# Altium PCB newwind.PcbDoc
Units mil, origin at the board's own origin, x right, y up, seen from the top; angles counter-clockwise.
Board outline 4000 x 6500 mil, 2 copper layers (Top Layer, Bottom Layer); 121 components, 104 nets, 466 pads, 76 vias.
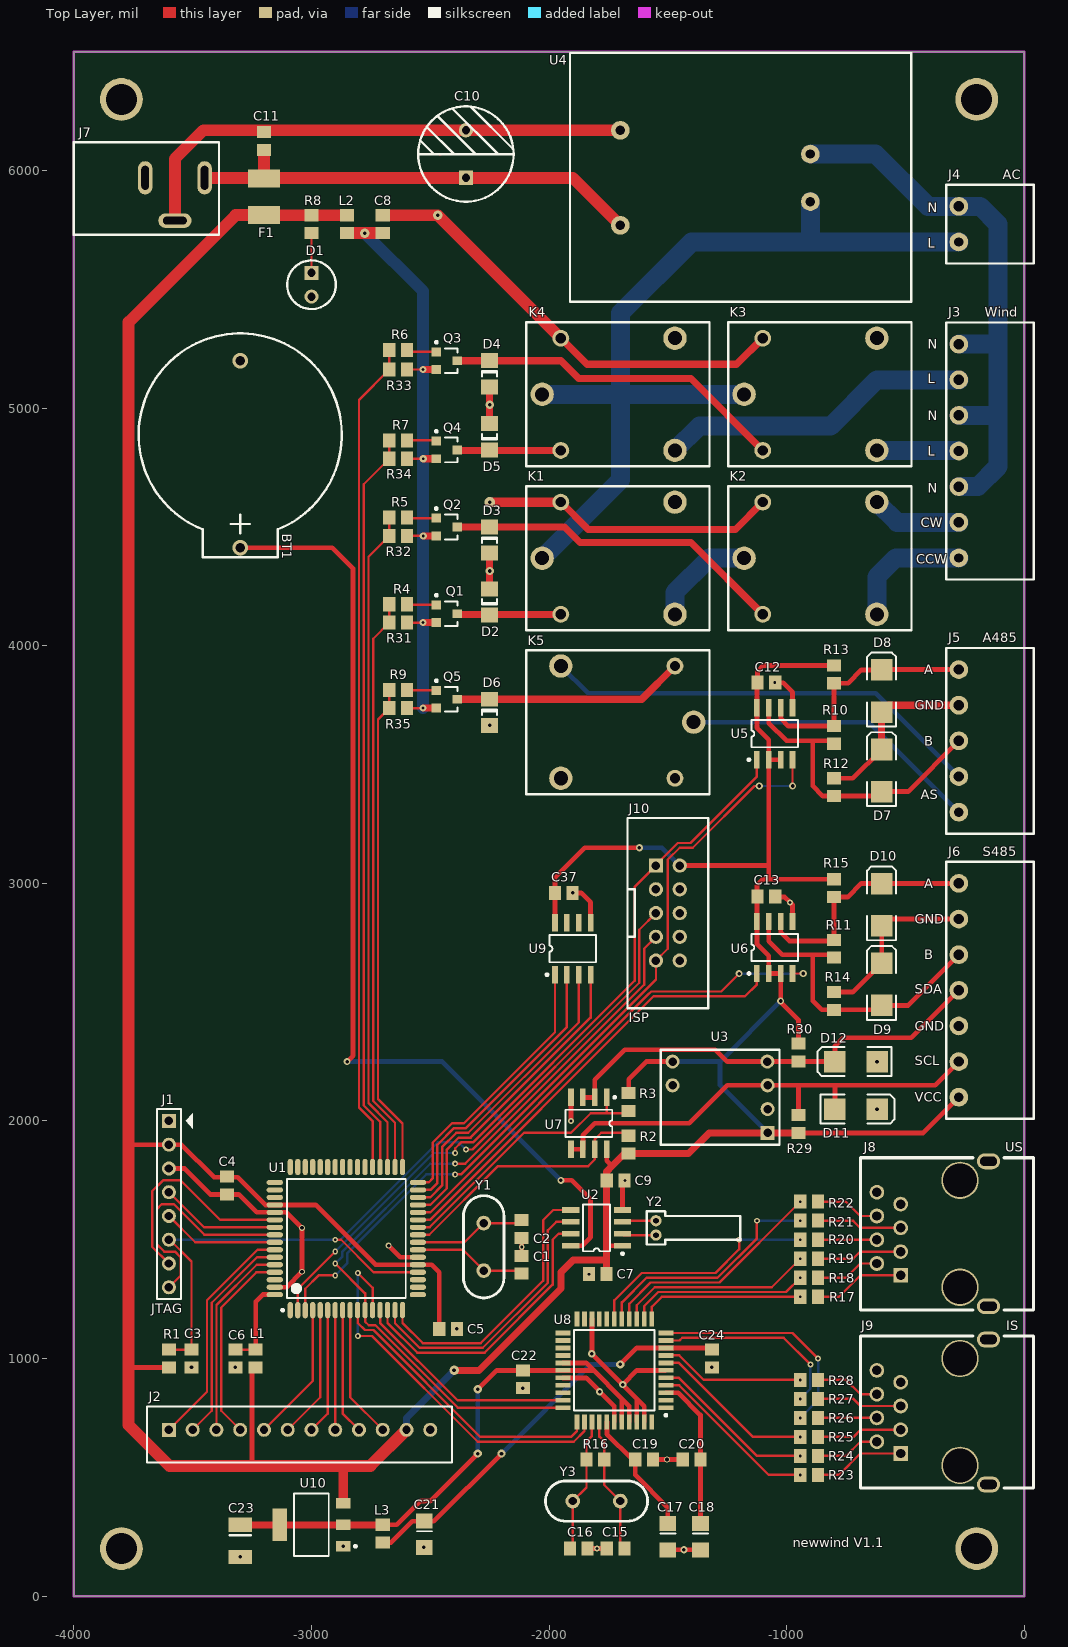
[diagram p0: Top Layer view]
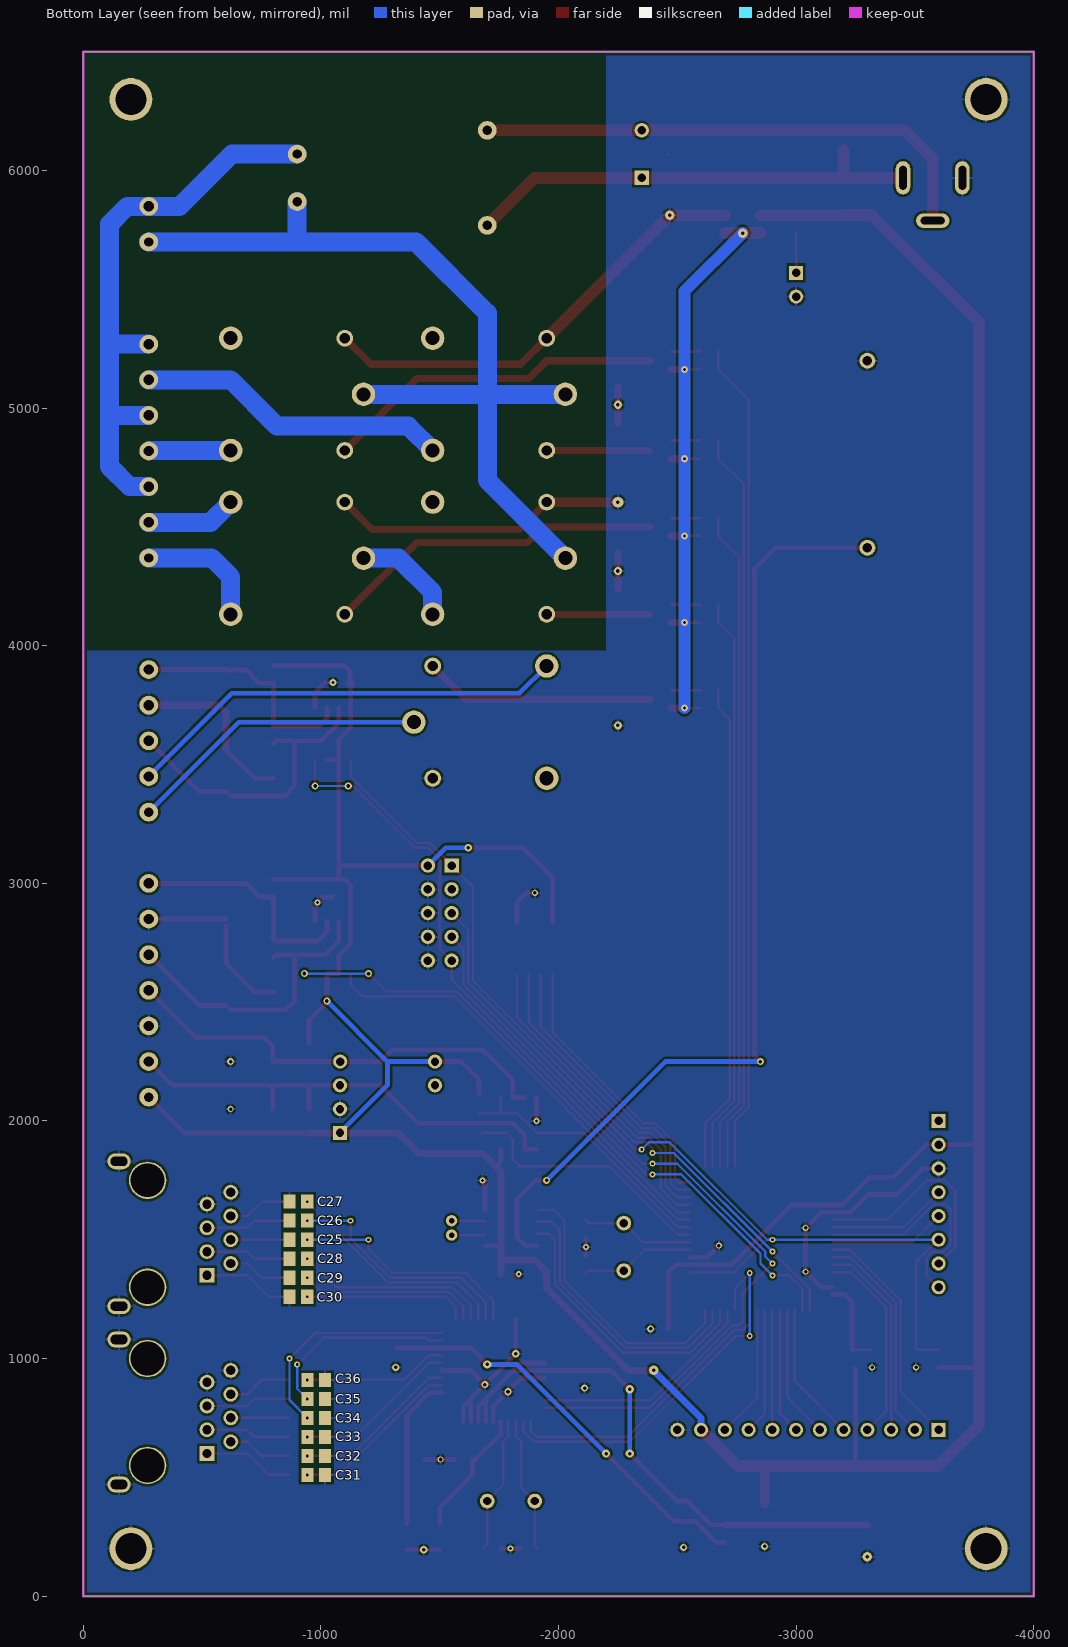
[diagram p1: Bottom Layer view, seen from below]

## Layer stack, top to bottom
Top Solder: solder mask 0.4, Solder Resist, Dk 3.5
Top Layer: signal copper 1.4
Dielectric 1: dielectric 12.6, FR-4, Dk 4.8
Bottom Layer: signal copper 1.4
Bottom Solder: solder mask 0.4, Solder Resist, Dk 3.5

## Board outline
-4000,0 0,0 0,6500 -4000,6500

## Design rules (kind name [scope] priority, off if disabled: settings)
Clearance [All] p1: gap=10 ignorepadtopadclearanceinfootprint=FALSE except(0: Arc-Hole Track-Hole SMDPad-Hole THPad-Hole Via-Hole Fill-Hole Poly-Hole Region-Hole Text-Hole; 8: SMDPad-SMDPad)
HoleSize [All] p1: absolutevalues=TRUE maxlimit=150 minlimit=1 maxpercent=80.000 minpercent=20.000
MinimumSolderMaskSliver [All] p1: minsoldermaskwidth=1
PolygonConnect [All] p1: connectstyle=Relief reliefconductorwidth=10 reliefentries=4 polygonreliefangle="90 Angle" airgapwidth=10
RoutingVias [All] p1: holewidth=12 width=25 viastyle="Through Hole" minholewidth=12 minwidth=25 maxholewidth=15 maxwidth=50
SilkToSilkClearance [All] p1: silktosilkclearance=8
SilkToSolderMaskClearance [IsPad] p1: minsilkscreentomaskgap=6 clearancetoexposedcopper=TRUE
SolderMaskExpansion [All] p1: expansion=4
Width GND [InNet('GND')] p1: maxlimit=50 minlimit=10 preferedwidth=40 toplayer_prefwidth=20 bottomlayer_minwidth=20 minimp=50.000000 maximp=50.000000 favimp=50.000000
Width VCC [InNet('VCC')] p2: maxlimit=50 minlimit=20 preferedwidth=20 minimp=50.000000 maximp=50.000000 favimp=50.000000
Width L [InNet('NetJ4_1')] p3: maxlimit=80 minlimit=40 preferedwidth=80 minimp=50.000000 maximp=50.000000 favimp=50.000000
Width N [InNet('NetJ3_3')] p4: maxlimit=80 minlimit=40 preferedwidth=80 minimp=50.000000 maximp=50.000000 favimp=50.000000
Width [All] p5: maxlimit=80 minlimit=10 preferedwidth=10 minimp=50.000000 maximp=50.000000 favimp=50.000000
26 further rules are at their usual default settings.

## Components (designator, comment, footprint, x,y, rotation, side; value= is the part's Value field where it differs from the comment)
BT1 "3V" CR2032 -3300,4412.6 r180 top
C1 "22pF" 0805 -2115,1394.76 r270 top
C2 "22pF" 0805 -2115,1545 r90 top
C3 "104" 0805 -3505,1000 r90 top
C4 "104" 0805 -3355,1728.23 r270 top
C5 "104" 0805 -2425,1125 r0 top
C6 "104" 0805 -3320,1000 r90 top
C7 "104" 0805 -1795,1355 r0 top
C8 "104" 0805 -2700,5775 r90 top
C9 "104" 0805 -1720,1750 r0 top
C10 "1000uF" C10 -2350,5970 r90 top
C11 "104" 0805 -3200,6125 r90 top
C12 "104" 0805 -1085,3845 r0 top
C13 "104" 0805 -1085,2945 r180 top
C15 "15pF" 0805 -1720,200 r0 top
C16 "15pF" 0805 -1875,200 r0 top
C17 "10uF" C1206 -1500,250 r90 top
C18 "10uF" C1206 -1362.6,250 r90 top
C19 "104" 0805 -1600,575 r0 top
C20 "104" 0805 -1400,575 r0 top
C21 "10uF" C1206 -2525,260 r90 top
C22 "104" 0805 -2110,912.6 r90 top
C23 "100uF" C1210 -3300,165 r90 top
C24 "104" 0805 -1315,1000 r90 top
C25 "333" 0805 -905,1500 r0 bottom
C26 "333" 0805 -905,1580 r0 bottom
C27 "333" 0805 -905,1660 r0 bottom
C28 "333" 0805 -905,1420 r0 bottom
C29 "333" 0805 -905,1340 r0 bottom
C30 "333" 0805 -905,1260 r0 bottom
C31 "333" 0805 -980,510 r180 bottom
C32 "333" 0805 -980,590 r180 bottom
C33 "333" 0805 -980,670 r180 bottom
C34 "333" 0805 -980,750 r180 bottom
C35 "333" 0805 -980,830 r180 bottom
C36 "333" 0805 -980,910 r180 bottom
C37 "104" 0805 -1938,2960 r0 top
D1 "Power" LED-2P -3000,5570 r270 top
D2 "1N4148" 1206 -2250,4185 r270 top
D3 "1N4148" 1206 -2250,4445 r90 top
D4 "1N4148" 1206 -2250,5145 r90 top
D5 "1N4148" 1206 -2250,4880 r270 top
D6 "1N4148" 1206 -2250,3720 r90 top
D7 "SMBJ6.8CA" SMB -600,3475 r90 top
D8 "SMBJ6.8CA" SMB -600,3810 r90 top
D9 "SMBJ6.8CA" SMB -600,2575 r90 top
D10 "SMBJ6.8CA" SMB -600,2910 r90 top
D11 "SMBJ6.8CA" SMB -708,2050 r0 top
D12 "SMBJ6.8CA" SMB -708,2250 r180 top
F1 "2A" 1812 -3200,5890 r270 top
J1 "JTAG" CON8 -3600,2000 r270 top
J2 "Panel" XH2.54-12P -3600,700 r0 top
J3 "Wind" 2EDG-3.81-7P -275,4370 r90 top
J4 "AC" 2EDG-3.81-2P -275,5700 r90 top
J5 "A485" 2EDG-3.81-5P -275,3300 r90 top
J6 "S485" 2EDG-3.81-7P -275,2100 r90 top
J7 "DC" PWR2.5 -3950,5910 r0 top
J8 "US" RJ-45 -385,1525 r0 top
J9 "IS" RJ-45 -385,775 r0 top
J10 "ISP" DC3-10 -1550,3075 r0 top
K1 "" T73 -1470,4605 r0 top
K2 "" T73 -620.04,4605 r0 top
K3 "" T73 -620.04,5295 r0 top
K4 "" T73 -1470,5295 r0 top
K5 "" T73 -1950.31,3442.56 r180 top
L1 "10uH" 0805 -3235,1000 r90 top
L2 "10uH" 0805 -2850,5775 r90 top
L3 "10uH" 0805 -2700,263 r90 top
Q1 "8550" SOT-23-3 -2430,4135 r270 top
Q2 "8550" SOT-23-3 -2430,4500 r270 top
Q3 "8550" SOT-23-3 -2430,5200 r270 top
Q4 "8550" SOT-23-3 -2430,4824.88 r270 top
Q5 "8550" SOT-23-3 -2430,3775.12 r270 top
R1 "104" 0805 -3600,1000 r90 top
R2 "103" 0805 -1665,1900 r90 top
R3 "103" 0805 -1665,2080 r270 top
R4 "102" 0805 -2635,4175 r0 top
R5 "102" 0805 -2635,4540 r0 top
R6 "102" 0805 -2635,5245 r0 top
R7 "102" 0805 -2635,4865 r0 top
R8 "102" 0805 -3000,5775 r90 top
R9 "102" 0805 -2635,3815 r180 top
R10 "121" 0805 -800,3625 r270 top
R11 "121" 0805 -800,2725 r270 top
R12 "102" 0805 -800,3405 r90 top
R13 "102" 0805 -800,3880 r270 top
R14 "102" 0805 -800,2505 r90 top
R15 "102" 0805 -800,2980 r270 top
R16 "106" 0805 -1805,575 r180 top
R17 "102" 0805 -905,1260 r0 top
R18 "102" 0805 -905,1340 r0 top
R19 "102" 0805 -905,1420 r0 top
R20 "102" 0805 -905,1500 r0 top
R21 "102" 0805 -905,1580 r0 top
R22 "102" 0805 -905,1660 r0 top
R23 "102" 0805 -905,510 r0 top
R24 "102" 0805 -905,590 r0 top
R25 "102" 0805 -905,670 r0 top
R26 "102" 0805 -905,750 r0 top
R27 "102" 0805 -905,830 r0 top
R28 "102" 0805 -905,910 r0 top
R29 "102" 0805 -949.6,1987 r90 top
R30 "102" 0805 -950,2288 r90 top
R31 "103" 0805 -2635,4097.6 r180 top
R32 "103" 0805 -2635,4462.72 r180 top
R33 "103" 0805 -2635,5163 r180 top
R34 "103" 0805 -2635,4787.48 r180 top
R35 "103" 0805 -2635,3737.72 r0 top
U1 "ATmega128A-8AU" ATMega128 -2853,1505 r90 top
U2 "DS1302Z" SOP-8P-3.9 -1800,1550 r90 top
U3 "SHT3X" SHT3X -1080,1950 r180 top
U4 "5V/1A" HIECUBE12W -900,6070 r180 top
U5 "MAX13487E" SOP-8P-3.9 -1050,3630 r0 top
U6 "MAX13487E" SOP-8P-3.9 -1050,2730 r0 top
U7 "P82B96TD" SOP-8P-3.9 -1832.4,1990 r180 top
U8 "RN8302B" QFP-44P-0.8 -1725,950 r180 top
U9 "93C46" SOP-8P-3.9 -1900,2725 r0 top
U10 "1117-3.3" SOT-223 -3000,300 r90 top
Y1 "14.7456M" CRYSTAL-2P -2275,1570 r90 top
Y2 "32.768K" 32.768K -1550,1499.68 r180 top
Y3 "8.192M" CRYSTAL-2P -1700,400 r0 top

## Footprints (in the part's own frame and the unit in brackets; to place one, negate y for a bottom-side part, rotate by r counter-clockwise, add the part's x,y. Pads: shape width x height; smd on the part's side, far side on the other; paste and mask are expansions set on the pad)
2EDG-3.81-2P [mm]
  round 2 hole 1: 1(0,0)
  round 2 hole 1.1: 2(3.81,0)
  silkscreen extent -2.3,-8 6.11,1.35
2EDG-3.81-5P [mm]
  round 2 hole 1: 1(0,0)
  round 2 hole 1.1: 2(3.81,0) 3(7.62,0) 4(11.43,0) 5(15.24,0)
  silkscreen extent -2.3,-8 17.54,1.35
2EDG-3.81-7P [mm]
  round 2 hole 1: 1(0,0)
  round 2 hole 1.1: 2(3.81,0) 3(7.62,0) 4(11.43,0) 5(15.24,0) 6(19.05,0) 7(22.86,0)
  silkscreen extent -2.3,-8 25.16,1.35
32.768K [mm]
  round 1.2 hole 0.6: 1(0,-0.5) 2(0,-2.04)
  silkscreen extent -9,-3.04 1,0.5
0805 [mm]
  rect 1.3x1.5 smd: 1(-0.95,0) 2(0.95,0)
1206 [mm]
  rect 1.6x1.8 smd: 1(-1.4,0) 2(1.4,0)
  silkscreen extent -0.3,-0.8 0.3,0.8
1812 [mm]
  rect 1.9x3.4 smd: 1(-1.95,0) 2(1.95,0)
ATMega128 [mm]
  oval 1.75x0.55 smd: 1(-7.65,6) 2(-7.65,5.2) 3(-7.65,4.4) 4(-7.65,3.6) 5(-7.65,2.8) 6(-7.65,2) 7(-7.65,1.2) 8(-7.65,0.4) 9(-7.65,-0.4) 10(-7.65,-1.2) 11(-7.65,-2) 12(-7.65,-2.8) 13(-7.65,-3.6) 14(-7.65,-4.4) 15(-7.65,-5.2) 16(-7.65,-6) 33(7.65,-6) 34(7.65,-5.2) 35(7.65,-4.4) 36(7.65,-3.6) 37(7.65,-2.8) 38(7.65,-2) 39(7.65,-1.2) 40(7.65,-0.4) 41(7.65,0.4) 42(7.65,1.2) 43(7.65,2) 44(7.65,2.8) 45(7.65,3.6) 46(7.65,4.4) 47(7.65,5.2) 48(7.65,6)
  oval 0.55x1.75 smd: 17(-6,-7.65) 18(-5.2,-7.65) 19(-4.4,-7.65) 20(-3.6,-7.65) 21(-2.8,-7.65) 22(-2,-7.65) 23(-1.2,-7.65) 24(-0.4,-7.65) 25(0.4,-7.65) 26(1.2,-7.65) 27(2,-7.65) 28(2.8,-7.65) 29(3.6,-7.65) 30(4.4,-7.65) 31(5.2,-7.65) 32(6,-7.65) 49(6,7.65) 50(5.2,7.65) 51(4.4,7.65) 52(3.6,7.65) 53(2.8,7.65) 54(2,7.65) 55(1.2,7.65) 56(0.4,7.65) 57(-0.4,7.65) 58(-1.2,7.65) 59(-2,7.65) 60(-2.8,7.65) 61(-3.6,7.65) 62(-4.4,7.65) 63(-5.2,7.65) 64(-6,7.65)
  silkscreen extent -7.77,-6.35 6.35,6.95
C10 [mil]
  rect 60x60 hole 34.65: 1(0,0)
  round 60 hole 34.65: 2(200,0)
  Top Layer lines w10: 100,110 100,105
  silkscreen extent -101,-201 301,201
C1206 [mm]
  rect 1.6x1.8 smd: 1(1.4,0) 2(-1.4,0)
  silkscreen extent 0.33,-0.81 0.33,0.79
C1210 [mil]
  rect 60x100 smd: 1(135,0) 2(0,0)
  silkscreen extent 91,-44 91,44
CON8 [mm]
  rect 1.5x1.5 hole 0.9: 1(0,0)
  round 1.5 hole 0.9: 2(2.54,0) 3(5.08,0) 4(7.62,0) 5(10.16,0) 6(12.7,0) 7(15.24,0) 8(17.78,0)
  silkscreen extent -1.27,-1.27 19.05,1.27
CR2032 [mm]
  round 1.7 hole 1: 1(0,0) 2(0,-20)
  silkscreen extent -10.86,-22.92 10.86,1
CRYSTAL-2P [mil]
  round 62 hole 35: 1(0,0) 2(-200,0)
  silkscreen extent -315,-85 115,85
DC3-10 [mil]
  rect 60x60 hole 35.43: 1(0,0)
  round 60 hole 35.43: 2(100,0) 3(0,-100) 4(100,-100) 5(0,-200) 6(100,-200) 7(0,-300) 8(100,-300) 9(0,-400) 10(100,-400)
  silkscreen extent -120,-600 220,200
HIECUBE12W [mm]
  round 2 hole 1: 1(0,5.08) 2(0,0) 3(20.32,7.62) 4(20.32,-2.54)
  silkscreen extent -10.8,-10.8 25.7,15.79
LED-2P [mm]
  rect 1.5x1.5 hole 0.9: 1(0,0)
  round 1.5 hole 0.9: 2(2.54,0)
  silkscreen extent -1.33,-2.6 3.87,2.6
PWR2.5 [mil]
  oval 61.26x140 hole 31.5 slot 100 at 90 deg: 1(500,60) 2(250,60)
  oval 140x61.26 hole 31.5 slot 100 at 0 deg: 3(375,-120)
  silkscreen extent -50,-180 561,210
QFP-44P-0.8 [mm]
  rect 1.6x0.5 smd: 1(-5.5,4) 2(-5.5,3.2) 3(-5.5,2.4) 4(-5.5,1.6) 5(-5.5,0.8) 6(-5.5,0) 7(-5.5,-0.8) 8(-5.5,-1.6) 9(-5.5,-2.4) 10(-5.5,-3.2) 11(-5.5,-4) 23(5.5,-4) 24(5.5,-3.2) 25(5.5,-2.4) 26(5.5,-1.6) 27(5.5,-0.8) 28(5.5,0) 29(5.5,0.8) 30(5.5,1.6) 31(5.5,2.4) 32(5.5,3.2) 33(5.5,4)
  rect 0.5x1.6 smd: 12(-4,-5.5) 13(-3.2,-5.5) 14(-2.4,-5.5) 15(-1.6,-5.5) 16(-0.8,-5.5) 17(0,-5.5) 18(0.8,-5.5) 19(1.6,-5.5) 20(2.4,-5.5) 21(3.2,-5.5) 22(4,-5.5) 34(4,5.5) 35(3.2,5.5) 36(2.4,5.5) 37(1.6,5.5) 38(0.8,5.5) 39(0,5.5) 40(-0.8,5.5) 41(-1.6,5.5) 42(-2.4,5.5) 43(-3.2,5.5) 44(-4,5.5)
  silkscreen extent -5.63,-4.3 4.3,4.92
RJ-45 [mm]
  rect 1.575x1.575 hole 1: 1(-3.43,-4.445)
  round 1.575 hole 1: 2(-5.97,-3.175) 3(-3.43,-1.905) 4(-5.97,-0.635) 5(-3.43,0.635) 6(-5.97,1.905) 7(-3.43,3.175) 8(-5.97,4.445)
  oval 2.5x1.7 hole 1 slot 1.8 at 0 deg: 9(5.97,-7.75) 10(5.97,7.75)
  round 4 hole 3.6: ""(2.92,-5.715) ""(2.92,5.715)
  silkscreen extent -7.71,-8.13 10.79,8.13
SHT3X [mm]
  rect 1.5x1.5 hole 0.9: 1(0,0)
  round 1.5 hole 0.9: 2(0,-2.54) 3(0,-5.08) 4(0.025,-7.62) 5(10.16,-7.62) 6(10.16,-5.08)
  silkscreen extent -1.27,-8.89 11.43,1.27
SMB [mm] "DO-214-AA/SMB; 2 C-Bend Leads; Body 5.3 x 3.6 mm, inc. leads (LxW)"
  rect 2.3x2.3 smd: 1(-2.25,0) 2(2.25,0)
  silkscreen extent -3.8,-1.55 4.1,1.55
SOP-8P-3.9 [mm]
  rect 0.6x1.85 smd: 1(-1.905,-2.775) 2(-0.635,-2.775) 3(0.635,-2.775) 4(1.905,-2.775) 5(1.905,2.775) 6(0.635,2.775) 7(-0.635,2.775) 8(-1.905,2.775)
  silkscreen extent -2.88,-2.9 2.5,1.45
SOT-23-3 [mm]
  rect 0.95x1 smd: 1(-0.95,-1.125) 2(0.95,-1.125) 3(0,1.125)
  silkscreen extent -2.1,-1.25 1.32,1.13
SOT-223 [mm]
  rect 1.1x1.55 smd: 1(-2.3,-3.375) 2(0,-3.375) 3(2.3,-3.375)
  rect 3.45x1.55 smd: 4(0,3.375)
  silkscreen extent -3.35,-4.83 3.35,1.85
T73 [mm]
  round 2.5 hole 1.5: 1(0,0) 3(-14.2,-6) 5(0,-12)
  round 1.8 hole 1.1: 2(-12.2,0) 4(-12.2,-12)
  silkscreen extent -15.9,-13.7 3.7,1.7
XH2.54-12P [mm]
  rect 1.5x1.5 hole 0.9: 1(0,0)
  round 1.5 hole 0.9: 2(2.54,0) 3(5.08,0) 4(7.62,0) 5(10.16,0) 6(12.7,0) 7(15.24,0) 8(17.78,0) 9(20.32,0) 10(22.86,0) 11(25.4,0) 12(27.94,0)
  silkscreen extent -2.34,-3.5 30.28,2.5

## Part data
BT1: library part Battery, "Multicell Battery"
C1 C2 C3 C4 C5 C6 C7 C8 C9 C11 C12 C13 C15 C16 C19 C20 C22 C24 C25 C26 C27 C28 C29 C30 C31 C32 C33 C34 C35 C36 C37: library part Cap1, "Capacitor"
C10 C17 C18 C21 C23: library part Cap2, "电解电容", LatestRevisionDate=17-Jul-2002, LatestRevisionNote="Re-released for DXP Platform.", PackageReference=C0805, Published=8-Jun-2000, Publisher="Altium Limited"
D1: library part LED, "Typical INFRARED GaAs LED"
D2 D3 D4 D5 D6: library part Diode, "Default Diode", PackageDocument=Sep-1996, Code_JEDEC=DO-214-AB, LatestRevisionDate=17-Jul-2002, LatestRevisionNote="Re-released for DXP Platform.", PackageReference=SMC, Published=8-Jun-2000, Publisher="Altium Limited"
D7 D8 D9 D10 D11 D12: library part TVS, LatestRevisionDate=17-Jul-2002, LatestRevisionNote="Re-released for DXP Platform.", Published=8-Jun-2000, Publisher="Altium Limited"
F1: library part "Fuse 1", "Fuse", LatestRevisionDate=17-Jul-2002, LatestRevisionNote="Re-released for DXP Platform.", PackageReference=PIN-W2/E2.8, Published=8-Jun-2000, Publisher="Altium Limited"
J1: library part MHDR1X8, "Header, 8-Pin", LatestRevisionDate=17-Jul-2002, LatestRevisionNote="Re-released for DXP Platform.", Publisher="Altium Limited"
J2: library part "Header 12", "Header, 12-Pin", LatestRevisionDate=17-Jul-2002, LatestRevisionNote="Re-released for DXP Platform.", Publisher="Altium Limited"
J3 J6: library part MHDR1X7, "Header, 7-Pin", LatestRevisionDate=17-Jul-2002, LatestRevisionNote="Re-released for DXP Platform.", Publisher="Altium Limited"
J4: library part MHDR1X2, "Header, 2-Pin", LatestRevisionDate=17-Jul-2002, LatestRevisionNote="Re-released for DXP Platform.", Publisher="Altium Limited"
J5: library part MHDR1X5, "Header, 5-Pin", LatestRevisionDate=17-Jul-2002, LatestRevisionNote="Re-released for DXP Platform.", Publisher="Altium Limited"
J7: library part PWR2.5, "2.5电源插座", DatasheetDocument=09-May-2002, Published=17-Dec-2003, Publisher="Altium Limited"
J8 J9: library part RJ45, "RJ45水晶座"
J10: library part "Header 5X2", "Header, 5-Pin, Dual row"
K1 K2 K3 K4 K5: library part Relay-6P, "6脚继电器"
L1 L2 L3: library part Inductor, "Inductor"
  L2 L3: Code_IEC=1005, Code_JEITA=0402, LatestRevisionDate=17-Jul-2002, LatestRevisionNote="Re-released for DXP Platform.", PackageReference=0402-A, Published=8-Jun-2000, Publisher="Altium Limited"
Q1 Q2 Q3 Q4 Q5: "PNP三极管"
R1 R2 R3 R4 R5 R6 R7 R8 R9 R10 R11 R12 R13 R14 R15 R16 R17 R18 R19 R20 R21 R22 R23 R24 R25 R26 R27 R28 R29 R30 R31 R32 R33 R34 R35: library part Res, "Resistor"
  R4 R5 R6 R7 R8 R9 R10 R11 R12 R13 R14 R15 R16 R17 R18 R19 R20 R21 R22 R23 R24 R25 R26 R27 R28 R29 R30: LatestRevisionDate=17-Jul-2002, LatestRevisionNote="Re-released for DXP Platform.", Published=8-Jun-2000, Publisher="Altium Limited"
U1: library part ATmega128L-8AC, "8-Bit AVR Microcontroller with 128K Bytes of In-System Programmable Flash Memory"
U2: "Trickle Charge Timekeeping Chip", Code_IPC=SOIC127P600-8, ComponentLink1Description="Manufacturer Link", ComponentLink1URL=http://www.maxim-ic.com/, ComponentLink2Description=Datasheet, ComponentLink2URL=http://pdfserv.maxim-ic.com/en/ds/DS1302.pdf, ComponentLink3Description="Discontinuation Notice", ComponentLink3URL=http://www.maxim-ic.com/qa/pdfs/non-obsolescence-letter.pdf, DatasheetVersion=2-Jul-1999, LatestRevisionDate=13-Apr-2006, LatestRevisionNote="IPC-7351 Footprint Added.", PackageDescription="8-Pin Small Outline Integrated Circuit 1.27 mm Pitch", PackageReference=SOIC8N, PackageVersion=1999, Published=13-Oct-2000, Publisher="Altium Limited"
U4: library part HIECUBE12W, "12W单输出模块"
U9: "SPI EEPROM", PackageDocument=Jul-1999, ComponentLink1Description="Manufacturer Link", ComponentLink1URL=http://www.st.com/, DatasheetDocument=Jun-1997, LatestRevisionDate=6-Jun-2005, LatestRevisionNote="Stylized 3D Model Added.", Note="Do Not Use pin number 7 (DU).", PackageReference=SOP8, Published=24-Aug-2001, Publisher="Altium Limited"
U10: library part 1117, "800mA 稳压", PackageDocument=revC, ComponentLink1Description="Manufacturer Link", ComponentLink1URL=http://www.ti.com/, DatasheetDocument=Sep-1997, LatestRevisionDate=17-Jul-2002, LatestRevisionNote="Re-released for DXP Platform.", PackageReference=ZZ311, Published=8-Jun-2000, Publisher="Altium Limited"
Y1 Y2 Y3: library part CRYSTAL-2, "Crystal Oscillator"

## Free pads (board coordinates)
  round 180 hole 130: ""(-3800,200) ""(-3800,6300) ""(-200,200) ""(-200,6300)

## Via types
v1: diameter 25, hole 12, Top Layer to Bottom Layer, 32 vias
v2: diameter 30, hole 15, Top Layer to Bottom Layer, 18 vias
v3: diameter 25, hole 15, Top Layer to Bottom Layer, 8 vias
v4: diameter 35, hole 15, Top Layer to Bottom Layer, 7 vias
v5: diameter 30, hole 12, Top Layer to Bottom Layer, 6 vias
v6: diameter 40, hole 15, Top Layer to Bottom Layer, 4 vias
v7: diameter 45, hole 15, Top Layer to Bottom Layer, 1 vias

## Nets (pads, with @x,y where several pads share a name; then routed paths per layer and width w, separated by ;. In a path a pad name is that pad's centre, name@x,y a point inside that pad or via, vN(x,y) a via of type N, cw(c..) or ccw(c..) an arc to the next point about the centre after c; other vN are vias at no path point)
3.3V: C22.2 C23.1 L3.2 U8.27 U8.28 U8.40 U8.41 U10.2 U10.4 | length 2434.7
  Top Layer w10: L3.2@-2700.4,300 L3.2
  Top Layer w20: L3.2 -2641.38,300.4 -2541.78,400 -2500,400 v4(-2300,600) ; v4(-2300,870) -2220,950 U8.28 -1812.01,950 ; U8.27 -1843.5,981.5 -1812.01,950 ; U8.40 -1693.5,831.5 ; U8.41 -1662.01,800 -1693.5,831.5 ; -1812.01,950 -1693.5,831.5
  Top Layer w30: C23.1 U10.4 U10.2 L3.2@-2700.4,300
  Bottom Layer w20: v4(-2300,600) v4(-2300,870)
A3.3V: C21.1 C24.2 L3.1 U8.9 | length 1727.1
  Top Layer w10: C24.2@-1322.09,1044.49 C24.2
  Top Layer w20: L3.1 -2664.4,225.6 -2574.88,315.12 C21.1 -2484.88,315.12 v4(-2200,600) ; v4(-1700,975) -1630.51,1044.49 U8.9 C24.2@-1322.09,1044.49
  Bottom Layer w20: v4(-2200,600) -1825,975 v4(-1700,975)
GND: BT1.2 C1.1 C2.1 C3.1 C4.2 C5.2 C6.1 C7.1 C8.2 C9.2 C12.2 C13.1 C15.1 C16.2 C17.2 C18.2 C19.2 C20.1 C21.2 C22.1 C23.2 C24.1 C25.2 C26.2 C27.2 C28.2 C29.2 C30.2 C31.2 C32.2 C33.2 C34.2 C35.2 C36.2 C37.2 D1.2 D2.1 D3.1 D4.1 D5.1 D6.1 D7.2 D8.1 D9.2 D10.1 D11.2 D12.1 J1.3 J2.12 J5.4 J6.3 J6.6 J7.2 J8.7 J8.8 J8.9 J8.10 J9.7 J9.8 J9.9 J9.10 J10.4 J10.6 J10.8 J10.10 K1.2 K2.2 K3.2 K4.2 K5.2 pad.@-200,200 pad.@-3800,200 pad.@-3800,6300 R12.2 R14.2 U1.22 U1.53 U1.63 U2.4 U3.2 U5.5 U6.5 U7.4 U8.6 U8.20 U8.29 U8.39 U8.42 U8.43 U9.5 U10.1 | length 8378.9
  Top Layer w20: J1.3 -3535,1800 -3425.83,1690.83 C4.2 -3305.83,1690.83 -3230.24,1615.24 U1.53 -3105.24,1615.24 v3(-3040,1550) v3(-3040,1365.28) -3105,1300.28 U1.63 ; v3(-2675,1475) -2626.26,1426.26 U1.22 ; C1.1 v1(-2115,1469.88) C2.1 ; U8.29 -1843.5,918.5 -1725,800 U8.39 ; U7.4 -1907.4,2000.4 v1(-1907,2000) ; v3(-1900.6,2960) -1865,2960 -1825,2920 U9.5 ; C16.2 v1(-1797.5,200) C15.1 ; v1(-1832.4,1355) C7.1@-1819.49,1342.09 ; U8.20 -1819.49,1019.49 v2(-1690,890) ; U2.4 C9.2@-1690.75,1750 ; U8.42 -1630.51,829.49 -1630,830 ; U8.43 -1599.02,799.02 -1630,830 ; C19.2 v3(-1503.46,575) C20.1 ; U8.6 -1630,950 v2(-1690,890) ; C17.2 C18.2 ; v5(-1050,3845) C12.2 -1015,3845 -975,3805 U5.5 ; C13.1 -1045.2,2942.6 -1007.6,2942.6 v1(-985,2920) -975,2910 U6.5 ; R14.2 -721.18,2542.4 D9.2 D10.1 ; R12.2 -721.18,3442.4 D7.2 ; D10.1@-600,2850 J6.6 ; D8.1 D8.1@-571.42,3750 ; v2(-1690,890) -1630,830
  Top Layer w30: D2.1 v4(-2250,4315) D3.1 ; D5.1 v4(-2250,5015) D4.1 ; K1.2 -1835.31,4490 -1215.35,4490 K2.2 ; K4.2 -1840.31,5185 -1210.35,5185 K3.2 ; D7.2 D8.1 ; D8.1@-571.42,3750 J5.4
  Top Layer w40: v7(-2250,4605) K1.2
  Top Layer w50: C8.2 v6(-2467.72,5812.4) K4.2
  other v1: -1680,1750
  other v2: -1432.4,195 -2526.78,205 -2867.13,209.45 -1787.4,860 -2110,875.2 -1315,962.6 -1820,1020 -2387.6,1125 -619.42,2250
  other v3: -3505,962.6 -3320,962.6 -619.42,2050
  other v4: -2250,3664.88
  other v6: -3300,165
NetBT1_1: BT1.1 U2.8 | length 4120.7
  Top Layer w20: BT1.1 -2912.6,4412.6 -2825,4325 -2825,2275 v2(-2850,2250) ; v2(-1950,1750) -1904.8,1750 -1825,1670.2 -1825,1510 -1860,1475 U2.8
  Bottom Layer w20: v2(-2850,2250) -2450,2250 v2(-1950,1750)
NetC1_2: C1.2 U1.23 Y1.2 | length 478.4
  Top Layer w10: U1.23 -2362.76,1457.76 Y1.2 -2127.64,1370 C1.2
NetC2_2: C2.2 U1.24 Y1.1 | length 475.4
  Top Layer w10: U1.24 -2355.75,1489.25 Y1.1 -2127.4,1570 C2.2
NetC6_2: C6.2 L1.2 U1.64 | length 381.1
  Top Layer w10: C6.2 L1.2 ; U1.64@-3155.4,1270 U1.64
  Top Layer w20: L1.2 -3235,1240 -3205.55,1269.45 U1.64@-3155.4,1269.45
NetC8_1: C8.1 L2.1 Q1.2 Q2.2 Q3.2 Q4.2 Q5.2 R31.1 R32.1 R33.1 R34.1 R35.2 | length 2868.1
  Top Layer w10: R35.2 -2530.28,3737.72 v5(-2530,3738) v5@-2529.72,3737.72 ; R31.1 v5(-2530,4097.6) ; R32.1 v5(-2529.6,4462.72) v5@-2529.48,4462.6 ; R34.1 v5(-2529.6,4787.48) ; R33.1 v5(-2530,5163) v5@-2529.6,5162.6
  Top Layer w30: v5(-2530,4097.6) Q1.2 ; v5@-2529.72,3737.72 Q5.2 ; v5(-2529.6,4787.48) Q4.2 ; v5@-2529.6,5162.6 Q3.2 ; v5@-2529.48,4462.6 Q2.2
  Top Layer w50: L2.1 v6(-2775,5737.6) C8.1
  Bottom Layer w50: v6(-2775,5737.6) -2530,5492.6 v5(-2530,5163) -2530,4787.48 -2530,4462.72 v5(-2530,4097.6) v5(-2530,3738)
NetC10_1: C10.1 C11.1 F1.1 J7.1 U4.3 | length 1953.7
  Top Layer w10: F1.1 F1.1@-3200,5970
  Top Layer w50: J7.1 F1.1@-3200,5970 ; C11.1 F1.1@-3200,5970 ; U4.3 -1900,5970 C10.1 F1.1@-3200,5970
NetC10_2: C10.2 C11.2 J7.3 U4.4 | length 2186.8
  Top Layer w10: C10.2@-2350,6165 C10.2@-2345,6170
  Top Layer w50: J7.3 -3575,6050 -3455,6170 C10.2 ; C10.2@-2345,6170 U4.4
NetC15_2: C15.2 R16.1 U8.37 Y3.1 | length 577.1
  Top Layer w10: U8.37 -1787.99,671.5 -1767.6,651.1 R16.1 -1767.6,467.6 Y3.1 -1700,217.4 C15.2
NetC16_1: C16.1 R16.2 U8.36 Y3.2 | length 572
  Top Layer w10: C16.1 -1900,212.4 Y3.2 -1842.4,457.6 R16.2 -1842.4,651.1 -1819.49,674.02 U8.36
NetC17_1: C17.1 C19.1 U8.38 | length 542
  Top Layer w20: U8.38 -1756.5,681.5 -1650,575 C19.1 -1637.4,510 -1500,372.6 C17.1
NetC18_1: C18.1 C20.2 U8.3 | length 641.6
  Top Layer w20: U8.3 -1455.87,855.51 -1362.6,762.24 C20.2 C18.1
NetC25_1: C25.1 R20.1 U8.17 | length 990.1
  Top Layer w10: U8.17 -1725,1245 -1610,1360 -1300,1360 -1200,1460 v1(-1200,1500)
  Bottom Layer w10: v1(-1200,1500) v1(-942.4,1500)
NetC26_1: C26.1 R21.1 U8.16 | length 1006.9
  Top Layer w10: U8.16 -1693.5,1236.5 -1590,1340 -1290.69,1340 -1125,1505.69 v1(-1125,1580)
  Bottom Layer w10: v1(-1125,1580) v1(-942.4,1580)
NetC27_1: C27.1 R22.1 U8.15 | length 961.5
  Top Layer w10: U8.15 -1662.01,1230.51 -1572.52,1320 -1282.4,1320 v1(-942.4,1660)
NetC28_1: C28.1 R19.1 U8.14 | length 827
  Top Layer w10: U8.14 -1630.51,1224.49 -1555,1300 -1062.4,1300 v1(-942.4,1420)
NetC29_1: C29.1 R18.1 U8.13 | length 760.4
  Top Layer w10: U8.13 -1599.02,1220.98 -1540,1280 -1002.4,1280 v1(-942.4,1340)
NetC30_1: C30.1 R17.1 U8.12 | length 693.7
  Top Layer w10: U8.12 -1567.52,1217.48 -1525,1260 v1(-942.4,1260)
NetC31_1: C31.1 R23.1 U8.4 | length 722.2
  Top Layer w10: U8.4 -1452.01,887.01 -1075,510 v1(-942.4,510)
NetC32_1: C32.1 R24.1 U8.5 | length 702.1
  Top Layer w10: U8.5 -1453.5,918.5 -1125,590 v1(-942.4,590)
NetC33_1: C33.1 R25.1 U8.7 | length 695.1
  Top Layer w10: U8.7 -1453.5,981.5 -1142.01,670 v1(-942.4,670)
NetC34_1: C34.1 R26.1 U8.11 | length 966.4
  Top Layer w10: U8.11 -975.08,1107.48 v1(-867.6,1000)
  Bottom Layer w10: v1(-942.4,750) -867.6,824.8 v1(-867.6,1000)
NetC35_1: C35.1 R27.1 U8.10 | length 822.4
  Top Layer w10: U8.10 -1450.51,1075.98 -1439.02,1087.48 -1012.48,1087.48 v1(-900,975)
  Bottom Layer w10: v1(-942.4,830) -900,872.4 v1(-900,975)
NetC36_1: C36.1 R28.1 U8.8 | length 608.7
  Top Layer w10: U8.8 -1452.01,1012.99 -1349.02,910 v1(-942.4,910)
NetD1_1: D1.1 R8.1 | length 167.6
  Top Layer w10: D1.1 R8.1
NetD2_2: D2.2 K1.4 Q1.3 | length 436.4
  Top Layer w10: Q1.3 Q1.3@-2383.27,4132.56
  Top Layer w30: Q1.3@-2383.27,4132.56 K1.4
NetD3_2: D3.2 K2.4 Q2.3 | length 1437.6
  Top Layer w30: Q2.3 -1935,4500 -1870,4435 -1402.8,4435 K2.4
NetD4_2: D4.2 K3.4 Q3.3 | length 1441.7
  Top Layer w30: Q3.3 -1950,5200 -1875,5125 -1402.8,5125 K3.4
NetD5_2: D5.2 K4.4 Q4.3 | length 436.4
  Top Layer w10: Q4.3 Q4.3@-2383.39,4822.56
  Top Layer w30: Q4.3@-2383.39,4822.56 K4.4
NetD6_2: D6.2 K5.4 Q5.3 | length 973.7
  Top Layer w30: Q5.3 -2385.59,3775 -1610,3775 K5.4
NetD7_1: D7.1 J5.3 R10.2 R12.1 U5.7 | length 1294.3
  Top Layer w10: D7.1@-618.82,3367.6 D7.1
  Top Layer w20: U5.7 -1075,3675 -1000,3600 -890,3600 ; R10.2 -812.4,3600 -890,3600 ; D7.1@-618.82,3367.6 R12.1 -847.6,3367.6 -890,3410 -890,3600 ; D7.1 -488.58,3386.42 J5.3
NetD8_2: D8.2 J5.5 R10.1 R13.2 U5.6 | length 1011.7
  Top Layer w10: D8.2 D8.2@-598.58,3900
  Top Layer w20: U5.6 -1025,3695 -992.4,3662.4 R10.1 R13.2 -740.98,3842.6 -685,3898.58 D8.2 ; D8.2@-598.58,3900 J5.5
NetD9_1: D9.1 J6.5 R11.2 R14.1 U6.7 | length 1307.5
  Top Layer w10: D9.1@-618.82,2467.6 D9.1
  Top Layer w20: U6.7 -1075,2757.4 -1017.6,2700 -890,2700 ; R11.2 -812.4,2700 -890,2700 ; D9.1@-618.82,2467.6 R14.1 -852.6,2467.6 -890,2505 -890,2700 ; D9.1 -488.58,2486.42 J6.5
NetD10_2: D10.2 J6.7 R11.1 R15.2 U6.6 | length 1008.8
  Top Layer w20: U6.6 -1025,2795 -987.4,2757.4 R11.1@-805,2757.4 ; R11.1 R15.2 -742.4,2942.6 -685,3000 J6.7
NetJ3_1: J3.1 K2.5 | length 535.6
  Bottom Layer w80: K2.5 -620.04,4290 -540.04,4370 J3.1
NetJ3_2: J3.2 K2.1 | length 380.2
  Bottom Layer w80: K2.1 -535.04,4520 J3.2
NetJ3_3: J3.3 J3.5 J3.7 J4.2 U4.2 | length 2462.4
  Bottom Layer w80: U4.2 -625,6070 -405,5850 J4.2 -185,5850 -110,5775 -110,5270 ; J3.3 -195,4670 -110,4755 -110,4970 ; J3.5 -110,4970 ; J3.7 -110,5270 ; -110,4970 -110,5270
NetJ3_4: J3.4 K3.5 | length 346.1
  Bottom Layer w10: J3.4@-277.56,4822.56 J3.4
  Bottom Layer w80: K3.5 J3.4@-277.56,4822.56
NetJ3_6: J3.6 K4.5 | length 1318.2
  Bottom Layer w80: K4.5 -1367.56,4925 -815.04,4925 -620.04,5120 J3.6
NetJ4_1: J4.1 K1.3 K3.3 K4.3 U4.1 | length 3736.7
  Bottom Layer w80: K1.3 -1700,4697.83 -1700,5058.78 ; K4.3 -1700,5058.78 ; K3.3 -1700,5058.78 ; U4.1 -900,5700 ; J4.1 -900,5700 ; -1700,5058.78 -1700,5400 -1400,5700 -900,5700
NetJ5_1: J5.1 K5.3 | length 1273.2
  Bottom Layer w20: K5.3 -653.78,3678.78 J5.1
NetJ5_2: J5.2 K5.5 | length 1867.9
  Bottom Layer w20: K5.5 -1835.31,3800 -625,3800 J5.2
NetJ8_1: J8.1 R17.2 | length 384.8
  Top Layer w10: R17.2 -780,1260 -690,1350 J8.1
NetJ8_2: J8.2 R18.2 | length 272.4
  Top Layer w10: R18.2 -750,1340 -690,1400 J8.2
NetJ8_3: J8.3 R19.2 | length 360
  Top Layer w10: R19.2 -720,1420 -690,1450 J8.3
NetJ8_4: J8.4 R20.2 | length 247.6
  Top Layer w10: R20.2 J8.4
NetJ8_5: J8.5 R21.2 | length 360
  Top Layer w10: R21.2 -720,1580 -690,1550 J8.5
NetJ8_6: J8.6 R22.2 | length 272.4
  Top Layer w10: R22.2 -750,1660 -690,1600 J8.6
NetJ9_1: J9.1 R23.2 | length 384.8
  Top Layer w10: R23.2 -780,510 -690,600 J9.1
NetJ9_2: J9.2 R24.2 | length 272.4
  Top Layer w10: R24.2 -750,590 -690,650 J9.2
NetJ9_3: J9.3 R25.2 | length 360
  Top Layer w10: R25.2 -718.5,670 -688.5,700 J9.3
NetJ9_4: J9.4 R26.2 | length 247.6
  Top Layer w10: R26.2 J9.4
NetJ9_5: J9.5 R27.2 | length 360
  Top Layer w10: R27.2 -718.5,830 -688.5,800 J9.5
NetJ9_6: J9.6 R28.2 | length 272.4
  Top Layer w10: R28.2 -750,910 -690,850 J9.6
NetK1_5: K1.5 K2.3 | length 442.9
  Bottom Layer w80: K1.5 -1470,4225 -1326.22,4368.78 K2.3
NetQ1_1: Q1.1 R4.2 | length 124.4
  Top Layer w10: R4.2 -2595,4172.4 Q1.1
NetQ2_1: Q2.1 R5.2 | length 124.6
  Top Layer w10: R5.2 -2595,4537.4 Q2.1 Q2.1@-2474.41,4537.52
NetQ3_1: Q3.1 R6.2 | length 126.5
  Top Layer w10: R6.2 -2590,5237.4 Q3.1
NetQ4_1: Q4.1 R7.2 | length 124.4
  Top Layer w10: R7.2 -2477.01,4865 Q4.1
NetQ5_1: Q5.1 R9.1 | length 125.7
  Top Layer w10: R9.1@-2600,3812.52 Q5.1
NetU2_2: U2.2 Y2.1 | length 143.1
  Top Layer w10: U2.2 -1685.12,1519.37 Y2.1
NetU2_3: U2.3 Y2.2 | length 142.8
  Top Layer w10: U2.3 -1685.75,1580 Y2.2
PB4: U1.14 U2.7 | length 1194.1
  Top Layer w10: U1.14 -2679.77,1149.77 -2555,1025 -2270.91,1025 -1985,1310.91 -1985,1500 -1960,1525 U2.7
PB5: U1.15 U2.6 | length 1186.2
  Top Layer w10: U1.15 -2648.28,1148.28 -2545,1045 -2279.2,1045 -2005,1319.2 -2005,1540 -1970,1575 U2.6
PB6: U1.16 U2.5 | length 1177.8
  Top Layer w10: U1.16 -2616.78,1150 -2531.78,1065 -2287.48,1065 -2025,1327.48 -2025,1582.24 -1982.24,1625 U2.5
PC0: R5.1 R32.2 U1.35 | length 2803.3
  Top Layer w10: U1.35 -2679.77,1994.77 -2760,2075 -2760,4375.12 R32.2 R5.1
PC1: R7.1 R34.2 U1.36 | length 3131.9
  Top Layer w10: U1.36 -2711.27,1996.79 -2780,2065.52 -2780,4679.88 R34.2 R7.1
PC2: R6.1 R33.2 U1.37 | length 3515.4
  Top Layer w10: U1.37 -2742.76,2000 -2800,2057.24 -2800,5035.4 R33.2 R6.1
PD0: R2.2 U1.25 U7.7 | length 1119.6
  Top Layer w10: U1.25 -2504.25,1520.75 -2215,1810 -1835,1810 -1807.4,1837.6 U7.7 -1807.4,1922.6 -1780,1950 -1677.6,1950 R2.2
PD1: R3.2 U1.26 U7.1 | length 1152.4
  Top Layer w10: U1.26 -2502.76,1552.24 -2105,1950 -1907.4,1950 -1824.8,2032.6 -1757.4,2032.6 ; U7.1 -1757.4,2032.6 ; R3.2@-1665,2032.6 -1757.4,2032.6
PD4: U1.29 U9.4 | length 1329.7
  Top Layer w10: U1.29 -2500,1646.73 -2430,1716.73 -2430,1880 -2380,1930 -2330,1930 -1825,2435 U9.4
PD5: U1.30 U9.3 | length 1277.5
  Top Layer w10: U1.30 -2500,1678.23 -2450,1728.23 -2450,1890 -2390,1950 -2340,1950 -1875,2415 U9.3
PD6: U1.31 U9.2 | length 1225.6
  Top Layer w10: U1.31 -2499.57,1709.72 -2470,1739.29 -2470,1900 -2400,1970 -2350,1970 -1925,2395 U9.2
PD7: U1.32 U9.1 | length 1169.4
  Top Layer w10: U1.32 -2506.38,1741.22 -2490,1757.6 -2490,1908.28 -2408.28,1990 -2358.28,1990 -1975,2373.28 U9.1
PE2: J2.5 U1.4 | length 588.8
  Top Layer w10: J2.5 -2994.73,905.27 U1.4
PE3: J2.6 U1.5 | length 560.5
  Top Layer w10: J2.6 -2963.24,836.76 U1.5
PE4: J2.7 U1.6 | length 532.1
  Top Layer w10: J2.7 -2931.74,768.26 U1.6
PE5: J2.8 U1.7 | length 503.9
  Top Layer w10: U1.7 -2900.24,700.24 J2.8
PE6: J2.9 U1.8 | length 532.3
  Top Layer w10: U1.8 -2868.75,768.75 J2.9
PE7: J2.10 U1.9 | length 560.7
  Top Layer w10: U1.9 -2837.25,837.25 J2.10
PF0: J2.4 U1.61 | length 835.4
  Top Layer w10: J2.4 -3380,780 -3380,1215 -3231.73,1363.27 U1.61
PF1: J2.3 U1.60 | length 841.1
  Top Layer w10: J2.3 -3400,1225 -3230.24,1394.76 U1.60
PF2: J2.2 U1.59 | length 913.2
  Top Layer w10: J2.2 -3420,780 -3420,1235 -3228.74,1426.26 U1.59
PF3: J2.1 U1.58 | length 985.2
  Top Layer w10: J2.1 -3440,860 -3440,1245 -3227.24,1457.76 U1.58
PG0: R9.2 R35.1 U1.33 | length 2071.3
  Top Layer w10: R9.2 R35.1 -2720,3690.12 -2720,2092.69 -2616.78,1989.47 U1.33
PG1: R4.1 R31.2 U1.34 | length 2434.8
  Top Layer w10: R4.1 R31.2 -2740,4030 -2740,2084.4 -2648.28,1992.68 U1.34
R\S\T\: C3.2 J1.6 J10.5 R1.2 U1.20 | length 3791.7
  Top Layer w10: R1.2 C3.2 -3505,1408.28 -3596.72,1500 J1.6 ; v1(-2900,1500) -2875,1500 -2738.27,1363.27 U1.20 U1.20@-2551.82,1357.6 ; v1(-2350,1880) -2321.57,1880 -1620,2581.57 -1620,2805 J10.5
  Bottom Layer w10: J1.6@-3595,1505 J1.6 v1(-2900,1500) -2878.28,1500 -2468.28,1910 -2380,1910 v1(-2350,1880)
RXD0: J10.1 U1.2 U5.1 | length 3230.7
  Top Layer w10: U1.2 -3057.72,1292.28 v1(-2900,1450) ; v1(-2395,1865) -2395,1885 -2370,1910 -2320,1910 -1640,2590 -1640,2985 J10.1 -1550,3078.28 -1458.28,3170 -1405,3170 -1125,3450 U5.1
  Bottom Layer w10: v1(-2900,1450) -2485,1865 v1(-2395,1865)
RXD1: U1.27 U6.1 | length 1883.2
  Top Layer w10: U1.27 -2501.26,1583.74 -1560,2525 -1175,2525 -1125,2575 U6.1
S\S\: U1.10 U8.34 | length 1224.3
  Top Layer w10: U1.10 -2805.76,1150.76 -2775,1120 -2739.27,1120 -2289.27,670 -1907.48,670 -1882.48,695 U8.34
SCK: J10.7 U1.11 U8.33 | length 3300.1
  Top Layer w10: v1(-2900,1400) -2774.26,1274.26 U1.11 -2774.26,1155.02 -2759.24,1140 -2730.98,1140 -2383.5,792.52 U8.33 ; v1(-2395,1820) -2353.28,1820 -1600,2573.28 -1600,2725 J10.7
  Bottom Layer w10: v1(-2900,1400) -2870,1430 -2870,1450 -2500,1820 v1(-2395,1820)
SCL: D11.1 J6.2 R29.2 U3.3 U7.5 U7.6 | length 2020.2
  Top Layer w10: -950,2050.4 -949.6,2050
  Top Layer w20: U7.5 U7.6 -1857.4,1940 -1807.4,1990 -1410,1990 -1250,2150 -950,2150 ; -950,2050.4 -950,2150 ; D11.1 -796.58,2150 ; J6.2 -375,2150 -796.58,2150 ; -950,2150 -796.58,2150
SDA: D12.2 J6.4 R30.1 U3.4 U7.2 U7.3 | length 1891.9
  Top Layer w20: U7.3 U7.2 -1807.4,2173.2 -1680.6,2300 -1300,2300 -1250,2250 U3.4 D12.2 -796.58,2315 -761.58,2350 -475,2350 J6.4
SDI: U1.13 U8.32 | length 958.6
  Top Layer w10: U1.13 -2711.27,1150 -2385.28,824.02 U8.32
SDO: U1.12 U8.35 | length 1642.4
  Top Layer w10: v1(-2805,1095) -2745.12,1095 -2300.12,650 -1895.98,650 -1850.98,695 U8.35 ; v1(-2805,1360) -2742.76,1297.76 U1.12
  Bottom Layer w10: v1(-2805,1095) v1(-2805,1360)
TCK: J1.5 U1.57 | length 491.7
  Top Layer w10: J1.5 -3489.25,1489.25 U1.57
TDI: J1.7 U1.54 | length 937.3
  Top Layer w10: J1.7 -3670,1470 -3670,1705 -3625,1750 -3550,1750 -3383.74,1583.74 U1.54
TDO: J1.4 U1.55 | length 507
  Top Layer w10: J1.4 -3452.24,1552.24 U1.55
TMS: J1.8 U1.56 | length 976.1
  Top Layer w10: J1.8 -3550,1350 -3550,1425 -3575,1450 -3620,1450 -3650,1480 -3650,1630 -3630,1650 -3580,1650 -3450.75,1520.75 U1.56
TXD0: J10.9 U1.3 U5.4 | length 3419.5
  Top Layer w10: U1.3 -3026.23,1293.77 -2970,1350 v1(-2900,1350) ; v1(-2395,1775) -2370,1775 -1550,2595 J10.9 -1500,2725 -1500,3100 -1450,3150 -1395,3150 -1135,3410 v2(-1115,3410) ; v2(-975,3410) U5.4
  Bottom Layer w10: v1(-2900,1350) -2850,1400 -2850,1441.72 -2516.72,1775 v1(-2395,1775) ; v2(-1115,3410) v2(-975,3410)
TXD1: U1.28 U6.4 | length 2083.3
  Top Layer w10: U1.28 -2499.76,1615.24 -1585,2530 -1570,2545 -1275,2545 v2(-1200,2620) ; U6.4 v2(-930,2620.75)
  Bottom Layer w10: v2(-1200,2620) -930.75,2620 v2(-930,2620.75)
VCC: C4.1 C5.1 C7.2 C9.1 C12.1 C13.2 C37.1 F1.2 J1.2 J2.11 J6.1 J10.2 L1.1 L2.2 R1.1 R2.1 R3.1 R8.2 R13.1 R15.1 R29.1 R30.2 U1.21 U1.52 U2.1 U3.1 U3.5 U5.2 U5.3 U5.8 U6.2 U6.3 U6.8 U7.8 U9.8 U10.3 | length 17736.8
  Top Layer w20: -3770,960 -3767.4,962.6 R1.1 ; -3770,1900 J1.2 -3547.4,1900 -3410,1762.6 -3310.87,1762.6 -3195,1646.73 U1.52 -2981.97,1646.73 -2730,1394.76 U1.21 -2493.9,1394.76 -2462.4,1363.27 C5.1 ; -3250,547.87 L1.1@-3250,960 ; F1.2 F1.2@-3199.17,5812.4 ; U9.8 -1975,2959.6 C37.1 -1975.4,3024.6 -1850,3150 v2(-1620,3150) ; -1757.6,1475 U2.1 ; U7.8 -1757.4,1832.4 -1735,1810 ; R3.1 -1665,2175.6 -1590.6,2250 U3.5 ; J10.2 -1075,3075 ; C12.1@-1125,3842.4 U5.8 -1125,3655 -1075,3605 U5.2 ; C12.1 -1122.4,3892.6 -1097.6,3917.4 R13.1 ; U5.3 U5.2 ; R30.2 -950,2425 -1025,2500 v2(-1025,2505) U6.3 U6.2 -1075,2695 -1125,2745 U6.8 -1125,2992.4 -1100,3017.4 -1075,3017.4 ; R29.1 -425.4,1949.6 J6.1 ; R15.1 -1075,3017.4 ; -1075,3017.4 -1075,3075 ; -1075,3075 U5.2
  Top Layer w30: v6(-2400,950) -2295,950 -1950,1295 -1950,1363.27 -1898.27,1415 -1757.6,1415 ; C7.2 -1757.6,1415 ; R29.1 -1325.4,1949.6 -1412.4,1862.6 R2.1 -1682.4,1862.6 -1735,1810 -1757.45,1787.55 -1757.45,1705 -1757.6,1475 -1757.6,1415
  Top Layer w40: U10.3 -2867.13,547.87 ; C12.1@-1125,3842.4 C12.1
  Top Layer w50: F1.2 -3319.17,5813.23 -3770,5362.4 -3770,1900 -3770,960 -3770,720 -3597.87,547.87 -3250,547.87 -2867.13,547.87 -2752.13,547.87 J2.11 ; F1.2@-3199.17,5812.4 R8.2 L2.2
  Bottom Layer w20: v2(-1620,3150) -1525,3150 J10.2 ; U3.5 -1280,2250 ; U3.1 -1280,2150 -1280,2250 ; v2(-1025,2505) -1280,2250
  Bottom Layer w30: J2.11 -2600,750 v6(-2400,950)
pads on no net: J1.1 J8. J9. J10.3 K1.1 K3.1 K4.1 K5.1 U1.1 U1.17 U1.18 U1.19 U1.38 U1.39 U1.40 U1.41 U1.42 U1.43 U1.44 U1.45 U1.46 U1.47 U1.48 U1.49 U1.50 U1.51 U1.62 U3.6 U8.1 U8.2 U8.18 U8.19 U8.21 U8.22 U8.23 U8.24 U8.25 U8.26 U8.30 U8.31 U8.44 U9.6 U9.7

## Polygon pours and split planes (outlines as drawn)
GND on Bottom Layer "Bottom Layer-No Net" (solid, pour order 2): -4000,6500 -4000,0 0,0 0,3980 -2200,3980 -2200,6500

## Keep-outs
Keep-Out Layer:
  the board outline again, w10

## Silkscreen, mask and mechanical layers (free items; w line width, h text height)
Top Overlay:
  region: -3530,2000.62 -3500,2033.12 -3500,1966.88
  text "N" at -405,5825 h40
  text "L" at -405,5675 h40
  text "N" at -405,5250 h40
  text "L" at -405,5105 h40
  text "N" at -405,4950 h40
  text "L" at -405,4800 h40
  text "N" at -405,4645 h40
  text "CW" at -435,4500 h40
  text "CCW" at -454.5,4345 h40
  text "A" at -420,3880 h40
  text "GND" at -460,3730 h40
  text "B" at -420,3580 h40
  text "AS" at -435,3355 h40
  text "A" at -420,2980 h40
  text "GND" at -460,2830 h40
  text "B" at -420,2680 h40
  text "SDA" at -460,2535 h40
  text "GND" at -460,2380 h40
  text "SCL" at -460,2235 h40
  text "VCC" at -460,2080 h40
  text "newwind V1.1" at -975,205 h40